# Altium PCB PCB1.PcbDoc
Units mm, origin at the board's own origin, x right, y up, seen from the top; angles counter-clockwise.
Board outline 77.25 x 49.25 mm, 2 copper layers (Top Layer, Layer 2); 18 components, 26 nets, 79 pads, 0 vias.
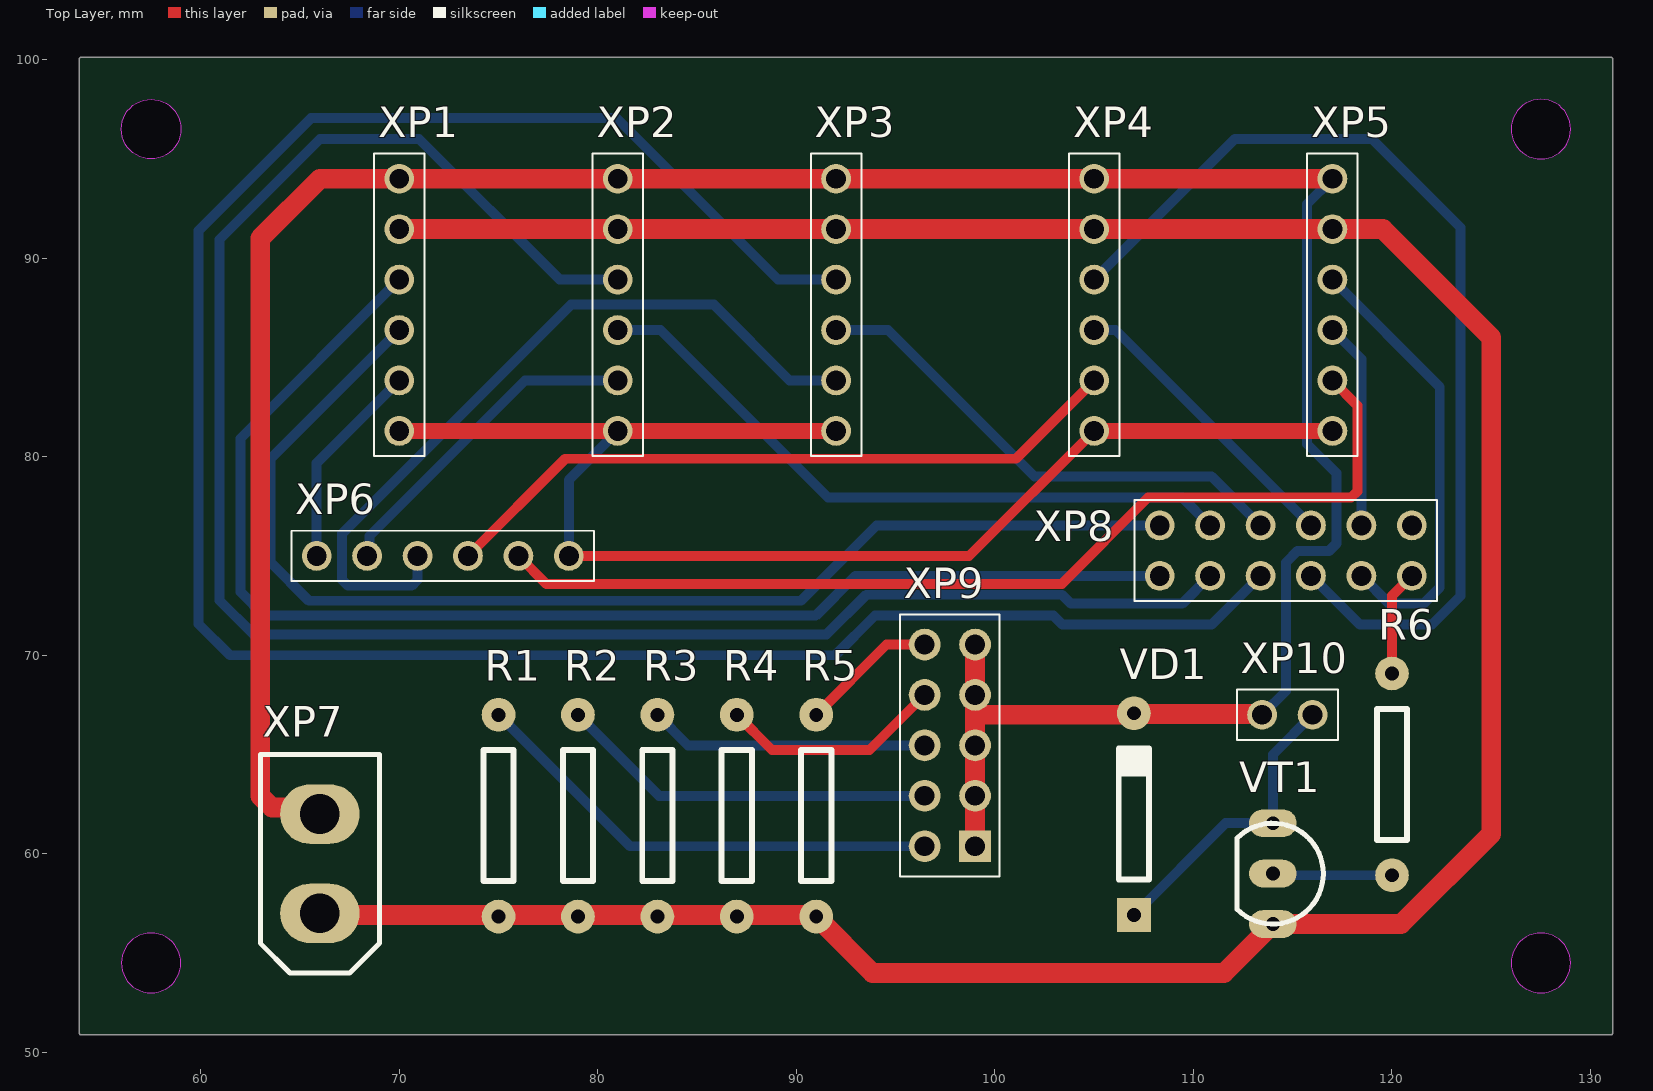
[diagram p0: Top Layer view]
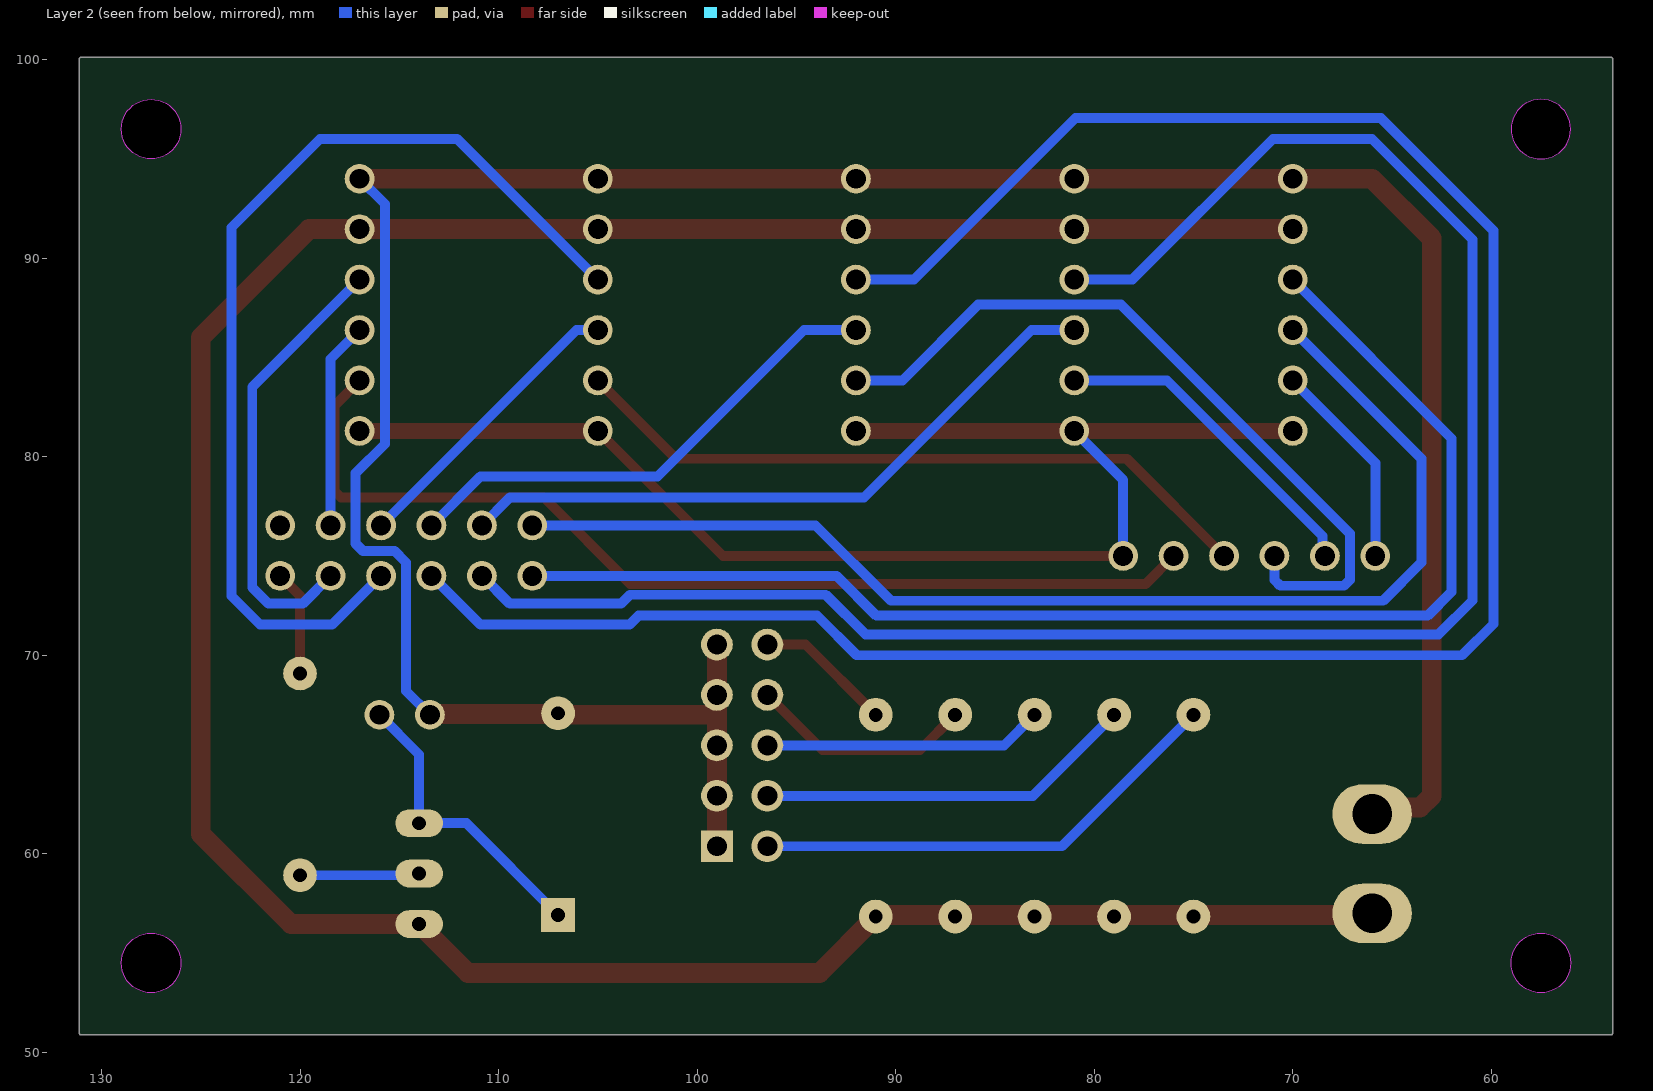
[diagram p1: Layer 2 view, seen from below]
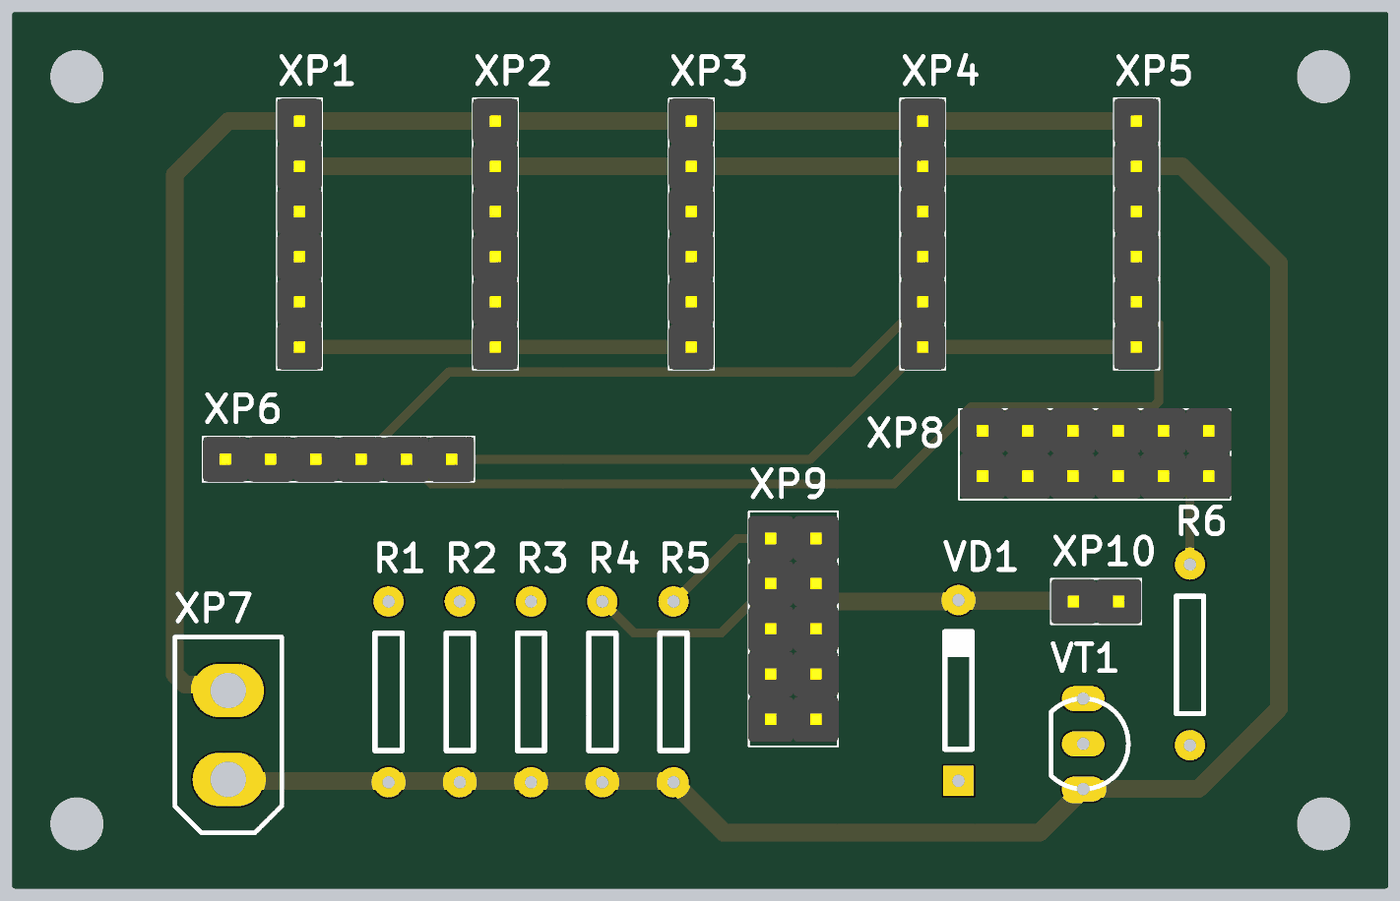
[diagram p2: 3D render of the assembled board from above, using the file's embedded part models]

## Layer stack, top to bottom
Top Layer: signal copper 0.035
Dielectric 1: dielectric 0.32, FR-4, Dk 4.8
Layer 2: signal copper 0.035
Bottom Solder: solder mask 0.0102, Solder Resist, Dk 3.5

## Board outline
53.873,51 53.873,100 cw(c54,100) 54,100.127 131,100.127 cw(c131,100) 131.127,100 131.127,51 cw(c131,51) 131,50.873 54,50.873 cw(c54,51)
cut-out: 56,54.5 ccw(c57.5,54.5) 57.5,53 ccw(c57.5,54.5) 59,54.5 ccw(c57.5,54.5) 57.5,56 ccw(c57.5,54.5)
cut-out: 126,54.5 ccw(c127.5,54.5) 127.5,53 ccw(c127.5,54.5) 129,54.5 ccw(c127.5,54.5) 127.5,56 ccw(c127.5,54.5)
cut-out: 126,96.5 ccw(c127.5,96.5) 127.5,95 ccw(c127.5,96.5) 129,96.5 ccw(c127.5,96.5) 127.5,98 ccw(c127.5,96.5)
cut-out: 57.5,95 cw(c57.5,96.5) 56,96.5 cw(c57.5,96.5) 57.5,98 cw(c57.5,96.5) 59,96.5 cw(c57.5,96.5)

## Design rules (kind name [scope] priority, off if disabled: settings)
Clearance [All] p1: gap=0.254 ignorepadtopadclearanceinfootprint=FALSE except(0: Arc-Hole Track-Hole SMDPad-Hole THPad-Hole Via-Hole Fill-Hole Poly-Hole Region-Hole Text-Hole)
PolygonConnect [All] p1: connectstyle=Relief reliefconductorwidth=0.254 reliefentries=4 polygonreliefangle="90 Angle" airgapwidth=0.254
RoutingVias [All] p1: holewidth=0.711 width=1.27 viastyle="Through Hole" minholewidth=0.711 minwidth=1.27 maxholewidth=0.711 maxwidth=1.27
SolderMaskExpansion [All] p1: expansion=0.102 istentingtop=FALSE
Width [All] p1: maxlimit=1 minlimit=0.254 preferedwidth=0.5
30 further rules are at their usual default settings.

## Components (designator, comment, footprint, x,y, rotation, side; value= is the part's Value field where it differs from the comment)
R1 "res" RES 75,61.92 r90 top
R2 "res" RES 79,61.92 r90 top
R3 "res" RES 83,61.92 r90 top
R4 "res" RES 87,61.92 r90 top
R5 "res" RES 91,61.92 r90 top
R6 "res" RES 120,64 r90 top
VD1 "VD" DIODE 107,62 r90 top
VT1 "npn" TO-92 114,59 r0 top
XP1 "SERV1" PLS-6 70,87.65 r270 top
XP2 "SERV2" PLS-6 81,87.65 r270 top
XP3 "SERV3" PLS-6 92,87.65 r270 top
XP4 "SERV4" PLS-6 105,87.65 r270 top
XP5 "SERV5" PLS-6 117,87.65 r270 top
XP6 "SIGN" PLS-6 72.19,75 r0 top
XP7 "XT30PW-M" XT30U-F 66,57 r0 top
XP8 "DRIVER" PLD-12 114.65,75.27 r0 top
XP9 "FInger_force" PLD-10 97.73,65.46 r180 top
XP10 "VIBRO_M" PLS-2 114.73,67 r0 top

## Footprints (in the part's own frame and the unit in brackets; to place one, negate y for a bottom-side part, rotate by r counter-clockwise, add the part's x,y. Pads: shape width x height; smd on the part's side, far side on the other; paste and mask are expansions set on the pad)
DIODE [mm]
  rect 1.7x1.7 hole 0.7: 1(-5.08,0)
  round 1.7 hole 0.7: 2(5.08,0)
  silkscreen extent -3.3,-0.76 3.3,0.76
PLD-10 [mm]
  rect 1.6x1.6 hole 1: 1(-1.27,5.08)
  round 1.6 hole 1: 2(1.27,5.08) 3(-1.27,2.54) 4(1.27,2.54) 5(-1.27,0) 6(1.27,0) 7(-1.27,-2.54) 8(1.27,-2.54) 9(-1.27,-5.08) 10(1.27,-5.08)
  silkscreen extent -2.5,-6.6 2.5,6.6, body extent -2.54,-6.35 2.54,6.35, height 8.54
PLD-12 [mm]
  round 1.5 hole 1: 1(-6.35,-1.27) 2(-6.35,1.27) 3(-3.81,-1.27) 4(-3.81,1.27) 5(-1.27,-1.27) 6(-1.27,1.27) 7(1.27,-1.27) 8(1.27,1.27) 9(3.81,-1.27) 10(3.81,1.27) 11(6.35,-1.27) 12(6.35,1.27)
  silkscreen extent -7.62,-2.54 7.62,2.54, body extent -7.57,-2.49 7.67,2.59, height 8.54
PLS-2 [mm]
  round 1.5 hole 1: 1(-1.27,0) 2(1.27,0)
  silkscreen extent -2.54,-1.27 2.54,1.27, body extent -2.54,-1.27 2.54,1.27, height 8.54
PLS-6 [mm]
  round 1.5 hole 1: 1(-6.35,0) 2(-3.81,0) 3(-1.27,0) 4(1.27,0) 5(3.81,0) 6(6.35,0)
  silkscreen extent -7.62,-1.27 7.62,1.27, body extent -7.62,-1.27 7.62,1.27, height 8.54
RES [mm]
  round 1.7 hole 0.7: 1(-5.08,0) 2(5.08,0)
  silkscreen extent -3.3,-0.76 3.3,0.76
TO-92 [mm]
  oval 2.4x1.4 hole 0.7: 1(0,2.54) 2(0,0) 3(0,-2.54)
  silkscreen extent -1.8,-2.54 2.54,2.54
XT30U-F [mm]
  oval 4x3 hole 2: 1(0,0) 2(0,5)
  silkscreen extent -3,-3 3,8

## Part data
XP1 XP2 XP3 XP4 XP5 XP6: library part PLS-6, "PLS-6"
XP8: library part PLD-12, "PLD-12"
XP9: library part PLD-10, "PLD-10"
XP10: library part PLS-2, "PLS-2"

## Nets (pads, with @x,y where several pads share a name; then routed paths per layer and width w, separated by ;. In a path a pad name is that pad's centre, name@x,y a point inside that pad or via, vN(x,y) a via of type N, cw(c..) or ccw(c..) an arc to the next point about the centre after c; other vN are vias at no path point)
GND: R1.1 R2.1 R3.1 R4.1 R5.1 VT1.3 XP1.2 XP2.2 XP3.2 XP4.2 XP5.2 XP7.1 | length 145.4
  Top Layer w1: XP7.1 66.08,56.92 75,56.92 79,56.92 83,56.92 87,56.92 90.92,56.92 R5.1 93.84,54 111.54,54 VT1.3 120.46,56.46 125,61 125,86 119.54,91.46 XP5.2 XP4.2 XP3.2 XP2.2 XP1.2
NetR1_2: R1.2 XP9.2 | length 24.2
  Layer 2 w0.5: R1.2 81.62,60.38 XP9.2
NetR2_2: R2.2 XP9.4 | length 19.2
  Layer 2 w0.5: R2.2 83.08,62.92 XP9.4
NetR3_2: R3.2 XP9.6 | length 14.1
  Layer 2 w0.5: R3.2 84.54,65.46 XP9.6
NetR4_2: R4.2 XP9.8 | length 11.3
  Top Layer w0.5: R4.2 88.778,65.222 93.682,65.222 XP9.8
NetR5_2: R5.2 XP9.10 | length 6.9
  Top Layer w0.5: R5.2 94.54,70.54 XP9.10
NetR6_1: R6.1 VT1.2 | length 6
  Layer 2 w0.5: VT1.2 114.08,58.92 R6.1
NetR6_2: R6.2 XP8.11 | length 5.3
  Top Layer w0.5: R6.2 120,73 XP8.11
NetVD1_1: VD1.1 VT1.1 XP10.2 | length 15.2
  Layer 2 w0.5: VD1.1 111.62,61.54 VT1.1 114,65 XP10.2
NetXP1_3: XP1.3 XP8.1 | length 66.7
  Layer 2 w0.5: XP1.3 62,80.92 62,73.194 63.202,71.992 90.973,71.992 92.981,74 XP8.1
NetXP1_4: XP1.4 XP8.2 | length 61.5
  Layer 2 w0.5: XP1.4 63.523,79.903 63.523,74.663 65.44,72.746 90.237,72.746 94.031,76.54 XP8.2
NetXP1_5: XP1.5 XP6.1 | length 10.6
  Layer 2 w0.5: XP6.1 65.84,79.68 XP1.5
NetXP1_6: XP1.6 XP2.6 XP3.6 XP4.6 XP5.6 XP6.6 | length 70.4
  Top Layer w0.5: XP6.6 98.7,75 XP4.6
  Top Layer w0.8: XP1.6 XP2.6 XP3.6 ; XP4.6 XP5.6
  Layer 2 w0.5: XP6.6 78.54,78.84 XP2.6
NetXP2_3: XP2.3 XP8.3 | length 95.5
  Layer 2 w0.5: XP2.3 78.08,88.92 71,96 66,96 60.946,90.946 60.946,72.757 62.649,71.054 91.526,71.054 93.52,73.048 103.378,73.048 103.83,72.596 109.436,72.596 XP8.3
NetXP2_4: XP2.4 XP8.4 | length 33.9
  Layer 2 w0.5: XP2.4 83.158,86.38 91.594,77.944 109.436,77.944 XP8.4
NetXP2_5: XP2.5 XP6.2 | length 16.8
  Layer 2 w0.5: XP6.2 68.501,75.121 68.501,76.001 76.34,83.84 XP2.5
NetXP3_3: XP3.3 XP8.5 | length 113.8
  Layer 2 w0.5: XP3.3 89.08,88.92 80.946,97.054 65.563,97.054 59.892,91.383 59.892,71.577 61.469,70 91.962,70 93.956,71.994 102.941,71.994 103.393,71.542 110.922,71.542 XP8.5
NetXP3_4: XP3.4 XP8.6 | length 25.5
  Layer 2 w0.5: XP3.4 94.62,86.38 102,79 110.92,79 XP8.6
NetXP3_5: XP3.5 XP6.3 | length 38.8
  Layer 2 w0.5: XP6.3 70.92,73.793 70.627,73.5 67.418,73.5 67.125,73.793 67.125,76.125 78.655,87.655 85.845,87.655 89.66,83.84 XP3.5
NetXP4_3: XP4.3 XP8.7 | length 50.9
  Layer 2 w0.5: XP4.3 112.08,96 119,96 123.458,91.542 123.458,72.982 122.018,71.542 118.378,71.542 XP8.7
NetXP4_4: XP4.4 XP8.8 | length 15
  Layer 2 w0.5: XP4.4 106.08,86.38 XP8.8
NetXP4_5: XP4.5 XP6.4 | length 35.2
  Top Layer w0.5: XP6.4 78.356,79.896 101.056,79.896 XP4.5
NetXP5_3: XP5.3 XP8.9 | length 22.6
  Layer 2 w0.5: XP5.3 122.404,83.516 122.404,73.418 121.582,72.596 119.864,72.596 XP8.9
NetXP5_4: XP5.4 XP8.10 | length 10.4
  Layer 2 w0.5: XP5.4 118.46,84.92 XP8.10
NetXP5_5: XP5.5 XP6.5 | length 50.9
  Top Layer w0.5: XP6.5 77.404,73.596 103.37,73.596 107.718,77.944 117.944,77.944 118.254,78.254 118.254,82.586 XP5.5
VCC: VD1.2 XP1.1 XP2.1 XP3.1 XP4.1 XP5.1 XP7.2 XP9.1 XP9.3 XP9.5 XP9.7 XP9.9 XP10.1 | length 142
  Top Layer w1: XP7.2 65.672,62.328 63.586,62.328 63,62.914 63,74.922 63,91 66,94 XP1.1 XP2.1 XP3.1 XP4.1 XP5.1 ; XP9.1 99,67 ; XP9.9 XP9.7 99,67 ; XP10.1 113.42,67.04 107.04,67.04 VD1.2 106.92,67 99,67
  Layer 2 w0.5: XP10.1 114.656,68.196 114.656,74.676 115.24,75.26 116.84,75.26 117.196,75.616 117.196,79.172 115.722,80.645 115.722,92.722 XP5.1
pads on no net: XP8.12

## Polygon pours and split planes (outlines as drawn)
no net on Mechanical 1 (none): 57.5,95 cw(c57.5,96.5) 56,96.5 cw(c57.5,96.5) 57.5,98 cw(c57.5,96.5) 59,96.5 cw(c57.5,96.5)

## Silkscreen, mask and mechanical layers (free items; w line width, h text height)
Mechanical 1:
  circle w0.254: c57.5,96.5 r1.5
  circle w0.254: c57.5,54.5 r1.5
  circle w0.254: c127.5,54.5 r1.5
  circle w0.254: c127.5,96.5 r1.5
  lines w0.254: 54,51 54,100 131,100 131,51 54,51